# EAGLE board panel (EAGLE 6.6.0)
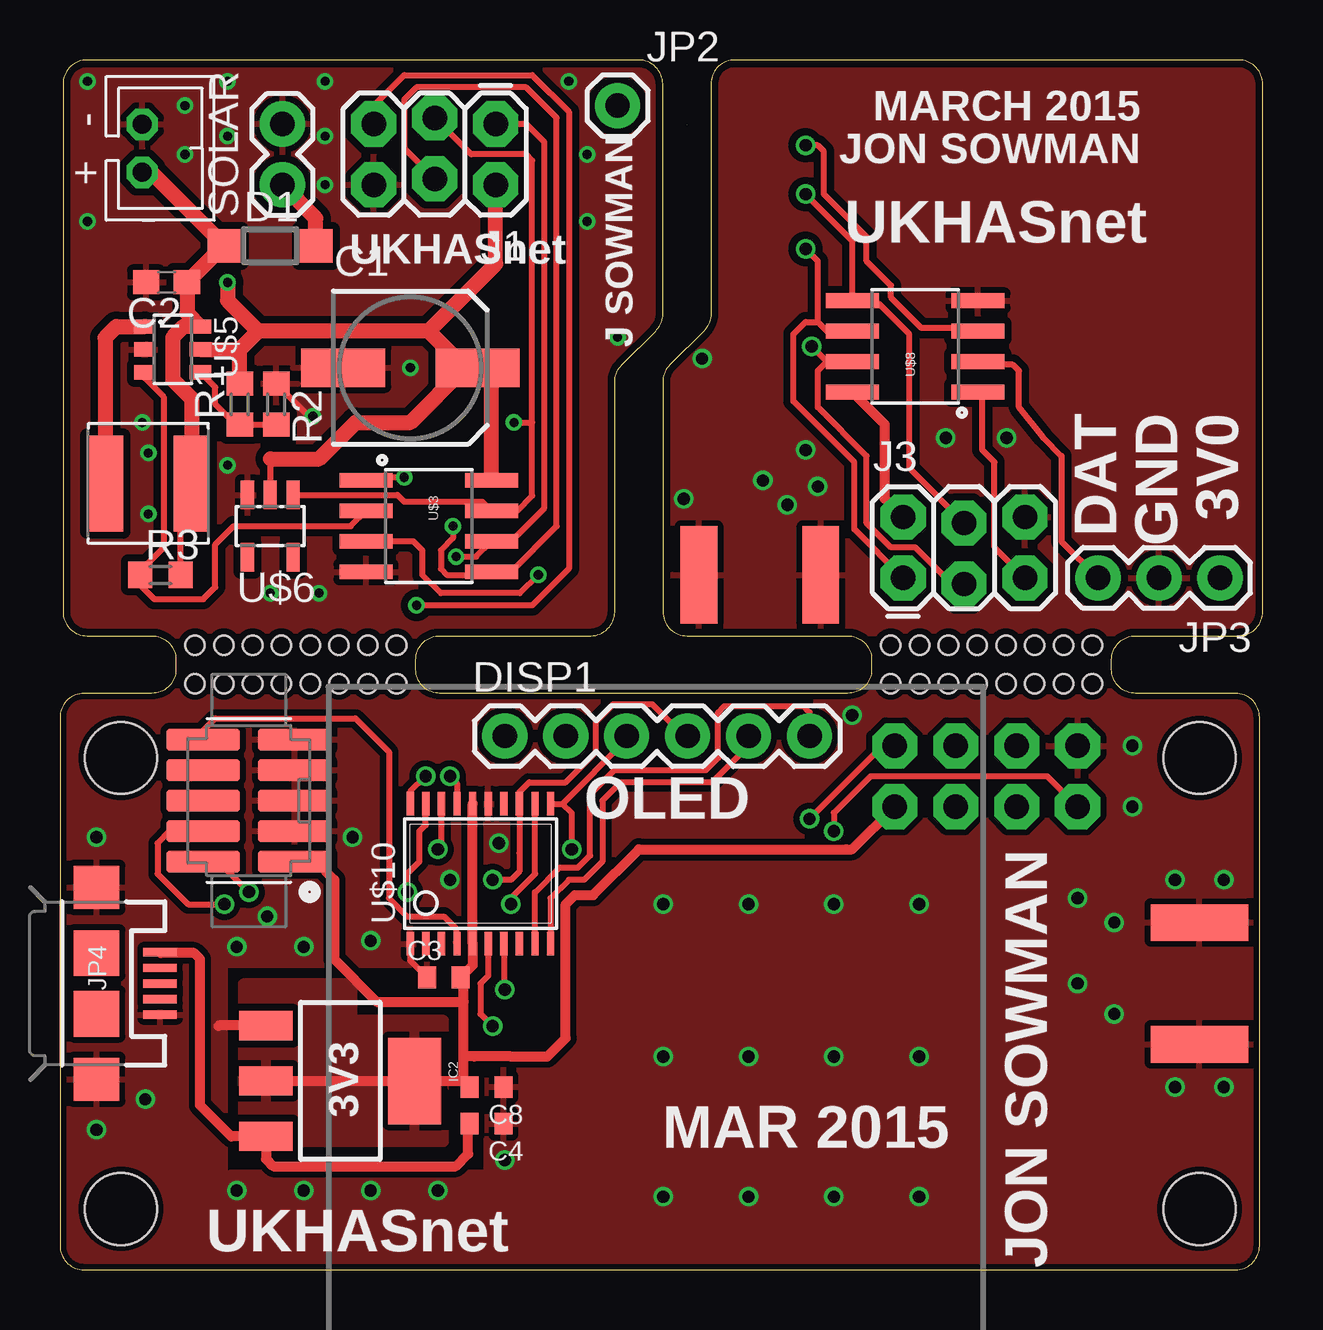
[diagram p0: board, top side]
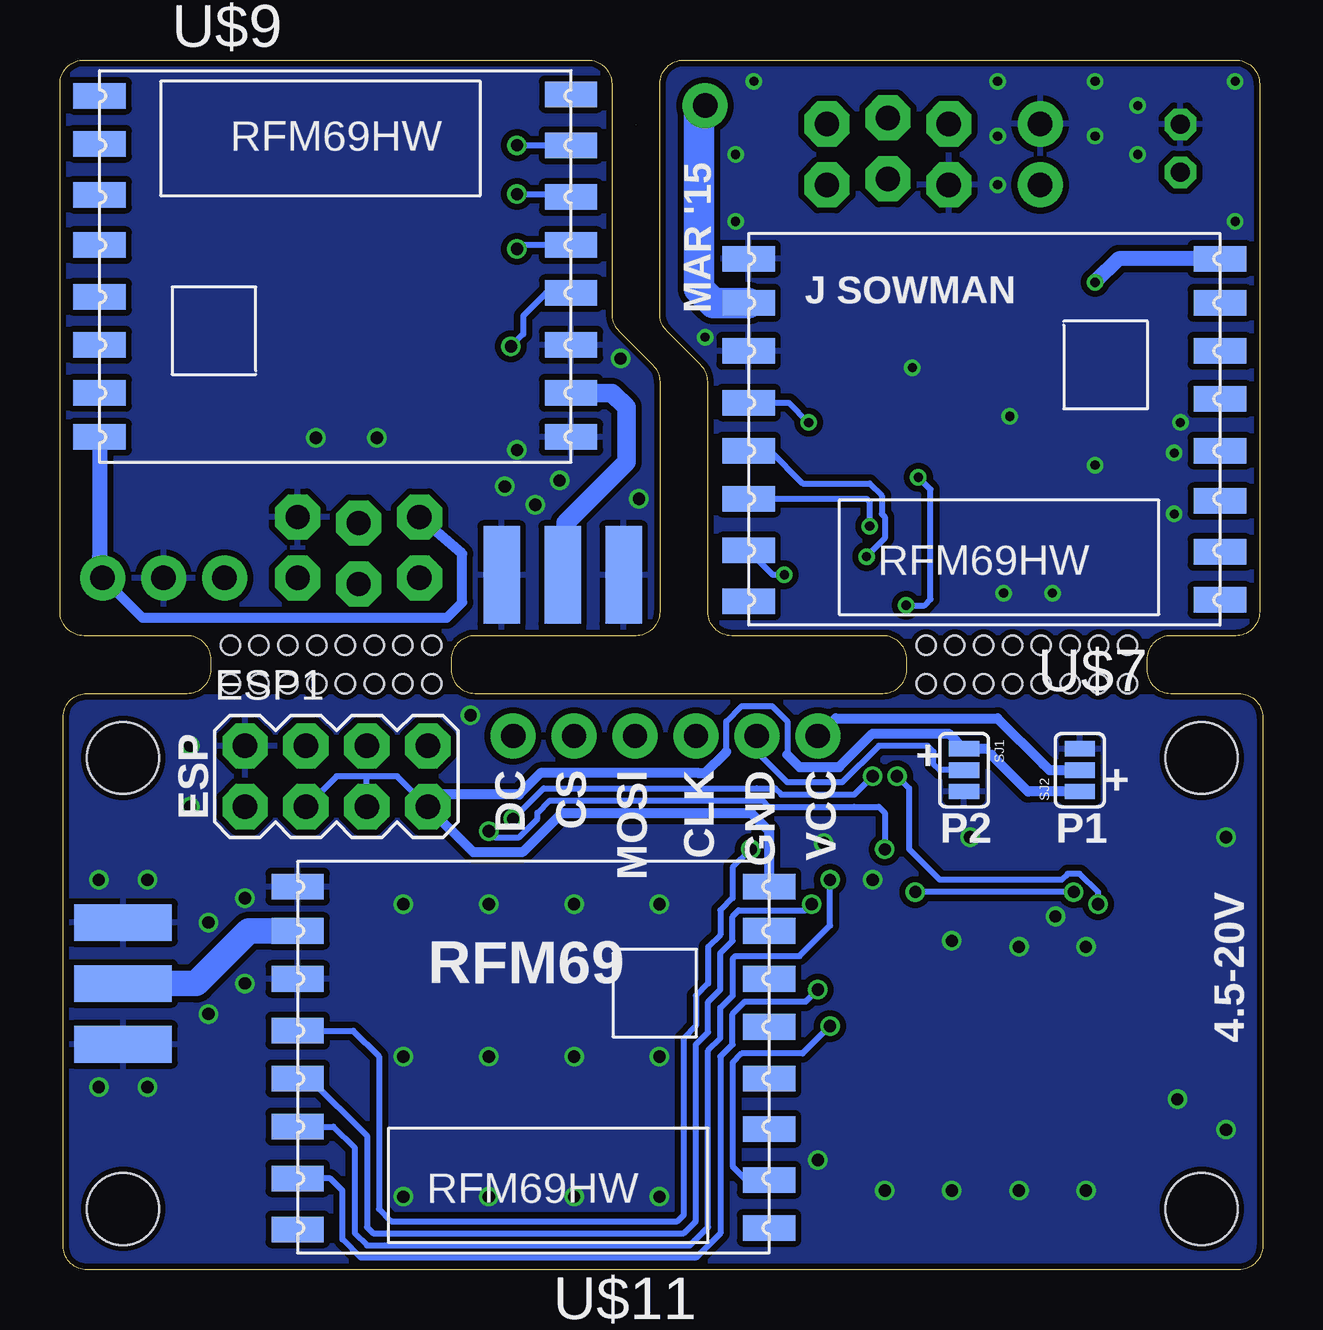
[diagram p1: board, bottom side, seen from below]

Size 50.13 x 50.43 mm. Coordinates in mm from the lower left corner, seen from the top.
Outline: 26.13,47.73 26.13,47.73
Outline: 43.83,25.03 43.83,25.33 43.83,25.43 arc-90 44.83,26.43 49.13,26.43 arc90 50.13,27.43 50.13,49.43 arc90 49.13,50.43 28.13,50.43 arc90 27.13,49.43 27.13,39.84 arc-45 26.84,39.14 25.42,37.72 arc45 25.13,37.02 25.13,27.43 arc90 26.13,26.43 32.83,26.43 arc-90 33.83,25.43 33.83,25.33 33.83,25.13 33.83,25.03 arc-90 32.83,24.03 15.83,24.03 arc-90 14.83,25.03 14.83,25.13 14.83,25.43 arc-90 15.83,26.43 22.13,26.43 arc89 23.13,27.43 23.13,34.73 23.13,37.02 arc-45 23.42,37.72 24.84,39.14 arc45 25.13,39.84 25.13,49.43 arc90 24.13,50.43 1.13,50.43 arc90 0.13,49.43 0.13,27.43 arc90 1.13,26.43 3.83,26.43 arc-90 4.83,25.43 4.83,25.23 4.83,25.03 arc-90 3.83,24.03 1,24.03 arc90 0,23.03 0,1 arc90 1,0 49,0 arc90 50,1 50,23.03 arc90 49,24.03 44.83,24.03 arc-90 43.83,25.03
Copper layers (1*16): Top 0.035mm / dielectric 1.5mm / Bottom 0.035mm
Design rules "SeeedStudio_2layer_DRU_no_angle_20140221": minimum track width 6mil, minimum drill 12mil, track to track 6mil, track to pad 6mil, pad to pad 6mil, via to via 6mil, smd to smd 0mil, copper to edge 10mil, drill to drill 10mil, minimum pad ring 10mil, minimum via ring 6mil, stop-mask expansion 2mil, vias tented up to drill 100mil, thermal gap 10mil
Holes 0.8 mm at 5.63,26.03 6.83,26.03 8.03,26.03 9.23,26.03 10.43,26.03 11.63,26.03 12.83,26.03 14.03,26.03 5.63,24.43 6.83,24.43 8.03,24.43 9.23,24.43 10.43,24.43 11.63,24.43 12.83,24.43 14.03,24.43 34.63,26.03 35.83,26.03 37.03,26.03 38.23,26.03 39.43,26.03 40.63,26.03 41.83,26.03 43.03,26.03 34.63,24.43 35.83,24.43 37.03,24.43 38.23,24.43 39.43,24.43 40.63,24.43 41.83,24.43 43.03,24.43
Holes 3 mm at 2.54,2.54 47.5,2.54 47.5,21.34 2.54,21.34

## Footprints (pad centres in the part's own frame; a part is rotated, then mirrored left to right if it is on the bottom)
SANYO-OSCON_SMD_C6 = smd 3.5 x 1.6: + 2.8,0; - -2.8,0
C0603 = smd 1.1 x 1: 1 -0.85,0; 2 0.85,0
C0603-L = smd 0.75 x 0.9: 1 -0.7,0; 2 0.7,0
SOD123 = smd 1.4 x 1.4: A 1.9,0; C -1.9,0
BOURNS_SRN5040_L = smd 1.5 x 4: P$1 -1.8,0; P$2 1.8,0
1X06 = drill 1.016 pad 1.88: 1 0,0; 2 2.54,0; 3 5.08,0; 4 7.62,0; 5 10.16,0; 6 12.7,0
2X4 = drill 1.016 pad 1.88 octagon: 1 -3.81,-1.27; 2 -3.81,1.27; 3 -1.27,-1.27; 4 -1.27,1.27; 5 1.27,-1.27; 6 1.27,1.27; 7 3.81,-1.27; 8 3.81,1.27
SOT223 = smd 1.219 x 2.235: 1 -2.311,-3.099; 2 0,-3.099; 3 2.311,-3.099 | smd 3.6 x 2.2: 4 0,3.099
2X3_LOCK = drill 1.016 pad 1.88 octagon: 1 0,0; 2 0,2.54; 3 2.54,-0.254; 4 2.54,2.286; 5 5.08,0; 6 5.08,2.54
JST-2-TH = drill 0.8 octagon: 1 1,0; 2 -1,0
SMA-EDGE = smd 1.524 x 4.064: GND@0 0,0; GND@1 5.08,0; SIG 2.54,0 | smd 1.524 x 4.064 bottom: GND@2 0,0; GND@3 5.08,0
1X01 = drill 1.016 pad 1.88: 1 0,0
1X03 = drill 1.016 pad 1.88: 1 0,0; 2 2.54,0; 3 5.08,0
USB-MICROB = smd 0.35 x 1.4: D+ 0,2.65; D- -0.65,2.65; GND 1.3,2.65; ID 0.65,2.65; VBUS -1.3,2.65 | smd 1.8 x 1.9: MT1 -4,0; MT2 4,0 | smd 1.9 x 1.9: P$1 -1.27,0; P$2 1.27,0
R0603 = smd 1 x 1.1: 1 -0.85,0; 2 0.85,0
SJ_3 = smd 0.635 x 1.27: 1 -0.889,0; 2 0,0; 3 0.889,0
1X02 = drill 1.016 pad 1.88: 1 0,0; 2 2.54,0
SO08 = smd 0.61 x 2.21: 1 -1.905,-2.616; 2 -0.635,-2.616; 3 0.635,-2.616; 4 1.905,-2.616; 5 1.905,2.616; 6 0.635,2.616; 7 -0.635,2.616; 8 -1.905,2.616
SOT23-6 = smd 0.6 x 0.9: 1 -0.95,-1.15; 2 0,-1.15; 3 0.95,-1.15; 4 0.95,1.15; 5 0,1.15; 6 -0.95,1.15
SOT23-5L = smd 0.55 x 1.2: 1 -0.95,-1.3; 2 0,-1.3; 3 0.95,-1.3; 4 0.95,1.3; 5 -0.95,1.3
RFM = smd 2.184 x 1.067: ANT 19.651,2.889; DIO0 0,13.27; DIO1 0,11.143; DIO2 0,9.047; DIO3 0,6.889; DIO4 0,4.889; DIO5 0,2.889; GNDA 19.651,4.889; GNDB 19.651,1.048; MISO 19.651,9.047; MOSI 19.651,11.047; NC 19.651,15.334; NSS 19.651,13.206; RESET 0,15.27; SCK 19.651,7.048; VCC 0,1.048
TSSOP20 = smd 0.305 x 0.991: 1 -2.925,-2.918; 2 -2.275,-2.918; 3 -1.625,-2.918; 4 -0.975,-2.918; 5 -0.325,-2.918; 6 0.325,-2.918; 7 0.975,-2.918; 8 1.625,-2.918; 9 2.275,-2.918; 10 2.925,-2.918; 11 2.925,2.918; 12 2.275,2.918; 13 1.625,2.918; 14 0.975,2.918; 15 0.325,2.918; 16 -0.325,2.918; 17 -0.975,2.918; 18 -1.625,2.918; 19 -2.275,2.918; 20 -2.925,2.918
SWD_SMD_SHROUD = smd 0.914 x 3.048: 1 -2.54,-1.905; 2 -2.54,1.905; 3 -1.27,-1.905; 4 -1.27,1.905; 5 0,-1.905; 6 0,1.905; 7 1.27,-1.905; 8 1.27,1.905; 9 2.54,-1.905; 10 2.54,1.905

## Placement (x,y rotation side)
C1  100u  [SANYO-OSCON_SMD_C6]  14.61,37.6 0 top
C2  4u7  [C0603]  4.45,41.16 180 top
C3  100n  [C0603-L]  16,12.19 0 top
C4  100n  [C0603-L]  17.78,6.1 180 top
C8  100n  [C0603-L]  17.78,7.62 180 top
D1  [SOD123]  8.76,42.69 0 top
DF  4u7  [BOURNS_SRN5040_L]  3.68,32.78 180 top
DISP1  [1X06]  18.54,22.25 0 top
ESP1  M04X2  [2X4]  38.61,20.57 0 bottom
IC2  [SOT223]  11.68,7.87 270 top
J1  AVR_SPI_PRG_62X3_LOCK  [2X3_LOCK]  18.16,47.77 180 top
J2  [JST-2-TH]  3.43,46.75 270 top
J3  AVR_SPI_PRG_62X3_LOCK  [2X3_LOCK]  35.14,28.84 0 top
J$2  SMA_EDGE  [SMA-EDGE]  26.63,28.97 180 bottom
J$3  SMA_EDGE  [SMA-EDGE]  47.5,9.4 90 bottom
JP2  M01PTH  [1X01]  23.24,48.53 0 top
JP3  [1X03]  48.35,28.84 180 top
JP4  USB-MICROB  [USB-MICROB]  1.52,11.94 270 top
R1  [R0603]  7.49,36.08 90 top
R2  [R0603]  9.02,36.08 270 top
R3  [R0603]  4.19,28.97 0 top
SJ1  [SJ_3]  12.45,20.83 270 bottom
SJ2  [SJ_3]  7.62,20.83 90 bottom
SOLAR  M02PTH  [1X02]  9.27,45.23 90 top
U$3  ATTINY13SOIC  [SO08]  15.37,31 270 top
U$5  MCP1640  [SOT23-6]  4.7,38.37 270 top
U$6  BU49X_VDET_SOT235  [SOT23-5L]  8.76,31 180 top
U$7  RFM69HW  [RFM]  1.78,43.19 180 bottom
U$8  ATTINY13SOIC  [SO08]  35.65,38.49 90 top
U$9  RFM69HW  [RFM]  48.48,33.67 0 bottom
U$10  STM32F030F4  [TSSOP20]  17.53,16.51 0 top
U$11  RFM69HW  [RFM]  20.57,17.02 180 bottom
U$12  SWD_SHROUD_SMD  [SWD_SMD_SHROUD]  7.87,19.56 90 top

## Library data of the parts
C1 C2 R1-R3 = rcl
C3 C4 C8 = passives-7351
D1 J2 U$10 U$12 = dtb
DF J$2 J$3 U$6 = jonsowman
DISP1 = SparkFun-Connectors; PROD_ID: CONN-08437
ESP1 J1 J3 JP2 JP3 SOLAR = SparkFun-Connectors
IC2 = SparkFun-PowerIC; PROD_ID: VREG-08170
JP4 = SparkFun-Connectors; PROD_ID: CONN-09505
SJ1 SJ2 = SparkFun-Retired
U$3 U$8 = SparkFun-DigitalIC
U$5 = ukhas
U$7 U$9 U$11 = hoperf

## Nets
DATA: JP3.3 U$8.2
DET/SCK: J1.3 U$3.7 U$6.1 U$7.SCK
DISPLAY_CS1: DISP1.5 U$10.10
DISPLAY_DC1: DISP1.6 U$10.9
DISPLAY_RST1: U$10.8
GND1: C1.- C2.2 J1.6 J2.2 R2.1 SOLAR.2 U$3.4 U$5.2 U$6.3 U$7.GNDA U$7.GNDB
GND2: J3.6 J$2.GND@0 J$2.GND@1 J$2.GND@2 J$2.GND@3 JP3.2 U$8.4 U$9.GNDA U$9.GNDB
GND3: C3.1 C4.1 C8.1 ESP1.2 IC2.1 J$3.GND@0 J$3.GND@1 J$3.GND@2 J$3.GND@3 JP4.GND JP4.MT1 JP4.MT2 SJ1.3 SJ2.3 U$10.1 U$10.15 U$11.GNDA U$11.GNDB U$12.3 U$12.5 U$12.7 U$12.9
MISO1: J1.1 U$3.6 U$7.MISO
MISO2: J3.1 U$8.6 U$9.MISO
MISO3: U$10.12 U$11.MISO
MOSI1: J1.4 U$3.5 U$7.MOSI
MOSI2: J3.4 U$8.5 U$9.MOSI
MOSI3: DISP1.4 U$10.13 U$11.MOSI
N$4: DF.P$2 U$5.1
N$5: R3.1 U$3.2 U$5.3
N$6: R1.1 R2.2 U$5.4
N$7: JP2.1 U$7.ANT
N$8: D1.A SOLAR.1
N$9: J$2.SIG U$9.ANT
N$10: J$3.SIG U$11.ANT
N$11: C4.2 IC2.3 JP4.VBUS
N$12: U$10.6 U$11.DIO0
N$13: DISP1.2 SJ1.2
N$14: DISP1.1 SJ2.2
NRST1: U$10.4 U$12.10
RESET: J1.5 U$3.1
RESET1: J3.5 U$8.1
RFM_CS1: U$10.7 U$11.NSS
RFM_SS: U$3.3 U$7.NSS
RFM_SS1: U$8.3 U$9.NSS
SCK1: J3.3 U$8.7 U$9.SCK
SCK2: DISP1.3 U$10.11 U$11.SCK
SWCLK1: U$10.20 U$12.4
SWDAT1: U$10.19 U$12.2
UART_RX1: ESP1.1 U$10.18
UART_TX1: ESP1.8 U$10.17
VBATT: C2.1 D1.C DF.P$1 J2.1 R3.2 U$5.6
VCC1: C1.+ J1.2 R1.2 U$3.8 U$5.5 U$6.2 U$7.VCC
VCC2: J3.2 JP3.1 U$8.8 U$9.VCC
VCC3: C3.2 C8.2 ESP1.3 ESP1.7 IC2.2 IC2.4 SJ1.1 SJ2.1 U$10.5 U$10.16 U$11.VCC U$12.1

## Tracks (layer width: path | path; a pad name or v marks a point on that pad's centre or on a via)
DATA
  Top 0.254: U$8.2 38.4,37.73 39.72,37.73 39.97,37.48 39.97,35.95 40.99,34.68 41.75,33.92 41.75,30.36 JP3.3
DET/SCK  (via drill 0.38)
  Top 0.254: 19.68,35.32 19.68,32.27 19.05,31.64 U$3.7 17.6,32.02 14.35,32.02 14.07,32.3 U$6.1 | 19.68,35.32 19.68,46.24 19.43,46.49 17.14,46.49 J1.3 | v18.92,35.32 19.68,35.32
  Bottom 0.254: U$7.SCK 19.75,36.15 v18.92,35.32
DISPLAY_CS1
  Top 0.254: DISP1.5 28.7,21.84 27.18,20.32 23.37,20.32 22.61,19.56 22.61,17.02 21.84,16.26 21.21,16.26 20.45,15.49 U$10.10
DISPLAY_DC1
  Top 0.254: U$10.9 19.8,15.74 20.83,16.76 21.59,16.76 22.1,17.27 22.1,19.81 23.11,20.83 26.92,20.83 27.43,21.34 27.43,23.24 27.69,23.5 30.99,23.5 31.24,23.24 DISP1.6
GND1  (via drill 0.38)
  Top 0.254: v10.54,35.57 10.38,35.57 R2.1
  other vias: 6.99,33.54 14.61,37.6 3.43,35.32 3.68,34.05 3.68,31.51 8.76,28.21 10.79,28.21 21.97,46.49 21.97,43.7 23.24,38.88 21.21,49.54 6.99,49.54 6.99,47.26 1.14,49.54 5.21,48.53 5.21,46.49 1.14,43.7 11.05,49.54 11.05,47.26 11.05,45.23
  pour Top (isolate 0.305): 0.13,26.43 23.24,26.43 23.24,37.6 25.02,39.38 25.02,50.3 0.13,50.3
  pour Bottom (isolate 0.254): 0.13,50.3 0.13,26.43 23.24,26.43 23.24,37.6 25.02,39.38 25.02,50.56 0.38,50.56 arc90
GND2  (via drill 0.51 pad 0.3)
  other vias: 36.92,34.68 39.46,34.68 30.32,31.89 29.3,32.9 26,32.14 26.76,37.98 31.08,34.17 31.59,32.65
  pour Top (isolate 0.305): 50.13,50.43 27.02,50.43 27.02,39.51 27.02,39.25 25.24,37.48 25.24,26.55 50.13,26.55
  pour Bottom (isolate 0.254): 50.13,26.55 50.13,50.43 27.02,50.43 27.02,39.25 25.24,37.48 25.24,26.3 49.88,26.3 arc90
GND3  (via drill 0.51)
  Top 0.254: U$10.1 14.6,12.89 C3.1
  Top 0.406: IC2.1 6.63,10.19 6.6,10.16
  other vias: 43.94,14.48 42.42,15.49 42.42,11.94 43.94,10.67 46.48,16.26 48.51,16.26 48.51,7.62 46.48,7.62 1.52,5.84 3.56,7.11 1.52,18.03 8.64,14.73 12.95,13.72 16.26,16.26 18.54,4.57 7.37,3.3 10.16,3.3 12.95,3.3 15.75,3.3 7.37,13.46 10.16,13.46 25.15,15.24 25.15,8.89 25.15,3.05 28.7,15.24 28.7,8.89 28.7,3.05 32.26,15.24 32.26,8.89 32.26,3.05 35.81,15.24 35.81,8.89 35.81,3.05 33.02,23.11 44.7,21.84 44.7,19.3 12.19,18.03 18.29,17.78
  pour Bottom (isolate 0.254): 0,23.88 0,0 50.04,0 50.04,23.88
  pour Top (isolate 0.254): 0,0 0,24.13 50.04,24.13 50.04,0 7.11,0 7.11,4.06 17.78,4.06 17.78,12.7 6.86,12.7 6.86,0
MISO1  (via drill 0.38)
  Top 0.254: J1.1 19.43,47.77 20.19,47 20.19,31.76 18.8,30.37 U$3.6 17.35,29.73 v16.51,29.73
  Bottom 0.254: U$7.MISO 20.54,34.15 19.18,32.78 16.38,32.78 15.88,32.27 15.88,31.51 15.75,31.38 15.75,30.49 v16.51,29.73
MISO2  (via drill 0.51 pad 0.3)
  Top 0.254: U$8.6 31.97,39.13 31.59,39.51 | 31.59,39.51 31.59,42.05 v31.08,42.56 | 31.59,39.51 31.08,39.51 30.57,39 30.57,36.21 33.11,33.67 33.11,30.87 J3.1
  Bottom 0.254: U$9.MISO 30.92,42.71 v31.08,42.56
MISO3  (via drill 0.51)
  Top 0.254: v18.8,15.24 18.8,15.49 19.81,16.51 19.81,19.42 U$10.12
  Bottom 0.254: U$11.MISO 39.72,7.97 37.34,5.59 37.34,1.78 37.08,1.52 24.13,1.52 23.62,2.03 23.62,9.4 23.11,9.91 23.11,11.18 22.61,11.68 22.61,13.21 22.1,13.72 22.1,14.73 21.84,14.99 19.05,14.99 v18.8,15.24
MOSI1  (via drill 0.38)
  Top 0.254: U$3.5 18.8,29.1 20.7,31 20.7,48.02 19.43,49.29 14.86,49.29 14.35,48.78 14.35,46.75 J1.4 | 17.86,29.22 U$3.5 | v16.38,31 16.38,30.49 15.88,29.98 15.88,29.22 16.13,28.97 17.86,28.97 U$3.5
  Bottom 0.254: U$7.MOSI 16.51,32.15 16.38,32.02 v16.38,31
MOSI2  (via drill 0.51 pad 0.3)
  Top 0.254: v31.08,44.84 33.04,42.89 U$8.5 33.16,40.27 34.13,40.27 35.4,39 35.4,33.41 J3.4
  Bottom 0.254: v31.08,44.84 28.96,44.84 U$9.MOSI
MOSI3  (via drill 0.51)
  Top 0.254: DISP1.4 26.01,22.25 24.69,23.57 23.06,23.57 22.35,22.86 22.35,21.59 21.08,20.32 19.56,20.32 19.15,19.91 U$10.13 19.15,17.37 19.15,16.61 18.8,16.26 v18.03,16.26
  Bottom 0.254: U$11.MOSI 38.74,5.97 37.85,5.08 37.85,1.52 37.34,1.02 23.88,1.02 23.11,1.78 23.11,9.14 22.61,9.65 22.61,10.92 22.1,11.43 22.1,12.95 21.97,13.08 19.3,13.08 18.03,14.35 v18.03,16.26
N$4
  Top 0.635: 1.65,32.55 DF.P$2 1.88,38.85 2.35,39.32 U$5.1
N$5
  Top 0.254: 3.29,29.02 R3.1 | R3.1 3.34,28.55 3.94,27.95 5.97,27.95 6.48,28.46 6.48,30.24 7.24,31 12.12,31 U$3.2 | R3.1 3.34,29.13 4.32,30.11 4.32,36.39 3.55,37.16 U$5.3
N$6
  Top 0.254: U$5.4 6.48,36.79 6.48,36.08 7.33,35.23 R1.1 R2.2
N$7
  Bottom 1.27: U$7.ANT 22.89,40.3 23.49,40.91 23.49,48.27 JP2.1
N$8
  Top 0.635: D1.A 10.66,43.83 SOLAR.1
N$9
  Bottom 0.762: U$9.ANT 27.11,36.55 26.51,35.95 26.51,33.67 29.05,31.13 29.05,29.09 J$2.SIG
N$10
  Bottom 1.067: U$11.ANT 42.26,14.13 44.45,11.94 J$3.SIG
N$11
  Top 0.254: 4.2,13.21 JP4.VBUS
  Top 0.406: C4.2 17.02,6.03 17.02,4.83 16.51,4.32 8.89,4.32 8.59,4.62 IC2.3 7.14,5.56 5.84,6.86 5.84,12.95 5.59,13.21 4.2,13.21
N$12  (via drill 0.51)
  Top 0.254: U$10.6 17.85,12.26 17.53,11.94 17.53,10.67 v18.03,10.16
  Bottom 0.254: v18.03,10.16 19.18,9.02 21.72,9.02 22.1,8.64 22.1,4.32 21.59,3.81 20.64,3.81 U$11.DIO0
N$13
  Bottom 0.254: DISP1.2 21.08,21.59 19.81,20.32 17.53,20.32 16,21.84 15.75,21.84 13.97,21.84 13.72,21.59 13.72,21.08 13.46,20.83 SJ1.2
N$14
  Bottom 0.406: DISP1.1 17.81,22.99 11.05,22.99 9.14,21.08 8.89,20.83 SJ2.2
NRST1
  Top 0.254: U$12.10 5.97,22.48 6.48,22.99 12.32,22.99 13.72,21.59 13.72,15.49 14.48,14.73 16,14.73 16.51,14.22 16.51,13.63 U$10.4
RESET  (via drill 0.38)
  Top 0.254: 12.62,33.03 U$3.1 12.88,33.03 v14.35,33.03 | J1.5 13.08,48.53 14.35,49.8 19.68,49.8 21.21,48.27 21.21,29.22 19.68,27.7 v14.86,27.7
  Bottom 0.254: v14.86,27.7 14.1,27.7 13.84,27.95 13.84,32.52 v14.35,33.03
RESET1
  Top 0.254: 38.14,36.71 U$8.1 | U$8.1 38.19,36.51 | J3.5 38.95,30.11 38.95,33.67 38.45,34.17 38.45,36.41 U$8.1
RFM_CS1  (via drill 0.51)
  Top 0.254: U$10.7 18.5,11.72 v18.54,11.68
  Bottom 0.254: U$11.NSS 38.86,3.81 38.35,3.3 38.35,1.27 37.59,0.51 23.62,0.51 22.61,1.52 22.61,8.89 22.1,9.4 22.1,10.67 21.59,11.18 19.05,11.18 v18.54,11.68
RFM_SS  (via drill 0.38)
  Top 0.254: 11.94,30.37 U$3.3 14.73,30.37 15.11,29.98 15.11,28.97 15.88,28.21 19.18,28.21 v19.94,28.97
  Bottom 0.254: v19.94,28.97 20.41,28.97 U$7.NSS
RFM_SS1  (via drill 0.51 pad 0.3)
  Top 0.254: U$8.3 38.14,39.25 35.91,39.25 34.64,40.52 34.64,41.03 33.62,42.05 33.62,43.06 31.84,44.84 31.84,46.62 31.59,46.87 v31.08,46.87
  Bottom 0.254: v31.08,46.87 U$9.NSS
SCK1  (via drill 0.51 pad 0.3)
  Top 0.254: J3.3 37.18,28.59 35.65,30.11 34.64,30.11 33.62,31.13 33.62,33.92 31.59,35.95 31.59,37.48 31.97,37.86 | 31.97,37.86 32.1,37.98 32.91,37.98 U$8.7 | v31.33,38.49 31.97,37.86
  Bottom 0.254: U$9.SCK 29.87,40.71 30.83,39.76 30.83,39 v31.33,38.49
SCK2  (via drill 0.51)
  Top 0.254: U$10.11 20.95,19.43 | DISP1.3 23.62,22.1 20.95,19.43 | v21.34,17.53 21.34,19.04 20.95,19.43
  Bottom 0.254: U$11.SCK 37.91,9.97 36.83,8.89 36.83,2.54 36.32,2.03 24.38,2.03 24.13,2.29 24.13,9.65 23.62,10.16 23.62,11.43 23.11,11.94 23.11,13.46 22.61,13.97 22.61,14.99 22.1,15.49 22.1,16.76 v21.34,17.53
SWCLK1  (via drill 0.51)
  Top 0.254: U$12.4 4.57,18.29 4.06,17.78 4.06,16.51 5.33,15.24 v6.86,15.24 | U$10.20 14.6,19.93 v15.24,20.57
  Bottom 0.254: v6.86,15.24 6.86,15.75 7.62,16.51 8.13,16.51 8.38,16.26 13.46,16.26 14.73,17.53 14.73,20.07 v15.24,20.57
SWDAT1  (via drill 0.51)
  Top 0.254: U$12.2 6.6,17.02 v7.87,15.75 | v14.48,15.75 14.48,16.51 14.99,17.02 14.99,18.29 15.24,18.54 15.24,19.42 U$10.19
  Bottom 0.254: v7.87,15.75 v14.48,15.75
UART_RX1  (via drill 0.51)
  Top 0.254: ESP1.1 41.15,20.57 33.78,20.57 32.26,19.05 v32.26,18.29 | v15.75,17.53 15.9,17.68 U$10.18
  Bottom 0.254: v32.26,18.29 32,18.03 30.99,18.03 30.23,18.8 30.23,19.05 29.72,19.56 20.83,19.56 20.57,19.3 17.02,19.3 16,19.3 15.75,19.05 v15.75,17.53
UART_TX1  (via drill 0.51)
  Top 0.254: v16.26,20.57 16.55,20.28 U$10.17 | v31.24,18.8 34.29,21.84 ESP1.8
  Bottom 0.254: v31.24,18.8 29.97,20.07 21.08,20.07 20.32,20.07 20.07,19.81 18.29,19.81 17.02,19.81 v16.26,20.57
VBATT
  Top 0.254: 5.06,33.71 5.23,33.54 | R3.2 5.04,33.1 5.23,33.29
  Top 0.635: 5.23,33.54 5.23,33.29 DF.P$1 5.48,36.31 4.7,37.1 4.7,38.88 5.14,39.32 U$5.6 5.29,39.87 C2.1 6.82,42.69 D1.C 3.8,45.75 J2.1
VCC1  (via drill 0.38)
  Top 0.254: 8.76,33.8 U$6.2
  Top 0.635: 16.89,37.6 C1.+ 17.98,37.03 U$3.8 | 16.89,37.6 15.37,39.13 | 15.37,39.13 8.26,39.13 | 15.37,39.13 18.16,41.92 J1.2 | 8.76,33.8 10.79,33.8 12.32,35.32 14.61,35.32 16.89,37.6 | v6.99,41.16 6.99,40.4 8.26,39.13 | U$5.5 7.49,38.37 | 7.49,38.37 8.26,39.13 | R1.2 7.49,38.37
  Bottom 0.635: U$7.VCC 6,42.15 v6.99,41.16
VCC2
  Top 0.406: J3.2 34.38,32.14 34.38,35.24 U$8.8
  Bottom 0.406: J3.2 33.37,29.86 33.37,27.82 34,27.19 46.7,27.19 JP3.1
  Bottom 0.635: U$9.VCC 48.48,29.73 JP3.1
VCC3
  Top 0.254: 16.83,12.07 C3.2 | U$12.1 10.54,17.02
  Top 0.406: IC2.2 IC2.4 16.83,7.87 | 16.83,7.87 C8.2 | C3.2 17.2,12.69 U$10.5 U$10.16 | 16.83,7.87 16.83,8.89 | 16.83,8.89 16.83,11.18 | 16.83,11.18 16.83,12.07 | 10.54,17.02 10.67,17.02 11.43,16.26 11.43,12.95 13.21,11.18 16.83,11.18 | 16.83,8.89 17.27,8.89 18.8,8.89 20.32,8.89 21.08,9.65 21.08,15.24 21.46,15.62 22.22,15.62 24.13,17.53 32.77,17.53 33.02,17.53 ESP1.7
  Bottom 0.254: ESP1.7 36.07,20.57 37.34,20.57 | 37.34,20.57 38.61,20.57 ESP1.3 | 11.3,21.46 11.56,21.72 | 22.35,21.59 22.35,22.86 21.72,23.5 20.45,23.5 19.81,22.86 19.81,21.46 | 37.34,19.35 37.34,19.86 37.34,20.57
  Bottom 0.406: 32.89,17.4 32.92,17.43 | 32.92,17.43 ESP1.7 34.29,19.81 30.99,19.81 30.1,20.7 23.49,20.7 23.24,20.7 22.35,21.59 | 32.92,17.43 30.83,17.43 29.21,19.05 21.34,19.05 20.57,18.29 U$11.VCC | 11.56,21.72 SJ1.1 13.08,22.35 13.97,22.35 16.26,22.35 17.65,20.95 19.3,20.95 19.81,21.46 | SJ2.1 9.78,19.94 11.3,21.46
  pour Top (isolate 0.305): 7.62,11.94 7.62,5.33 16,5.33 16,10.41 12.19,10.41 12.19,11.94

## Text on the board
tPlace: MARCH 2015 | J SOWMAN | JON SOWMAN | UKHASnet | UKHASnet | DAT | GND | 3V0 | OLED | JON SOWMAN | 3V3 | MAR 2015 | UKHASnet
bPlace: J SOWMAN | MAR '15 | ESP | + | VCC | GND | CLK | MOSI | CS | DC | + | P1 | P2 | 4.5-20V | RFM69
tOrigins: +